# Altium PCB Plant.PcbDoc
Units mm, origin at the board's own origin, x right, y up, seen from the top; angles counter-clockwise.
Board outline 16 x 13 mm, 4 copper layers (L1, L2, L3, L4), stack 1.581 mm thick; 30 components, 24 nets, 99 pads, 22 vias.
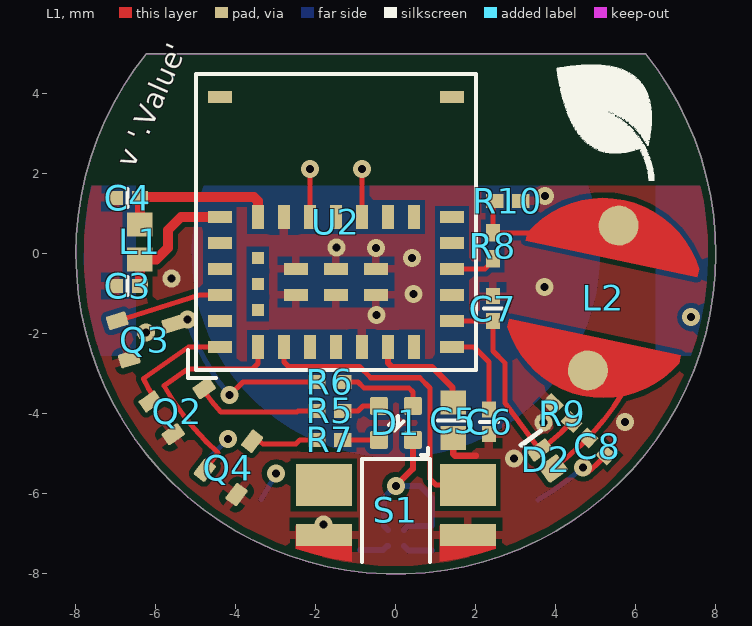
[diagram p0: L1 view]
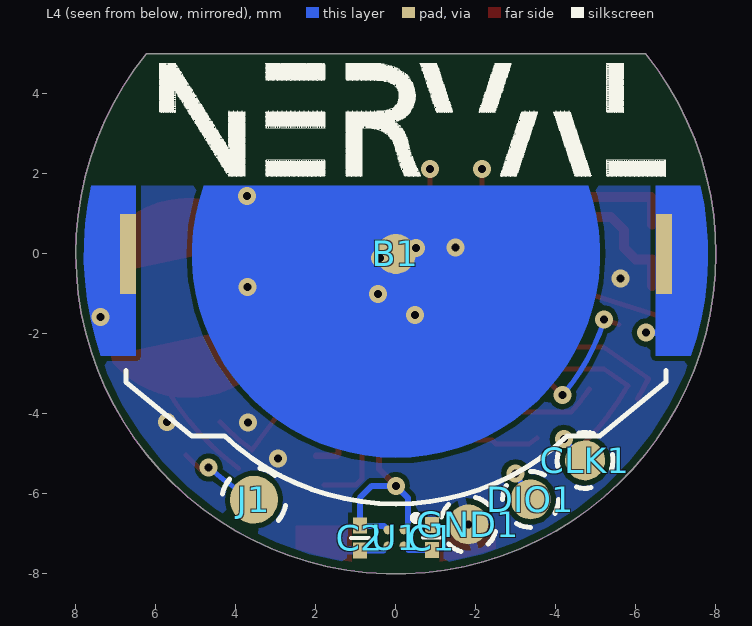
[diagram p1: L4 view, seen from below]
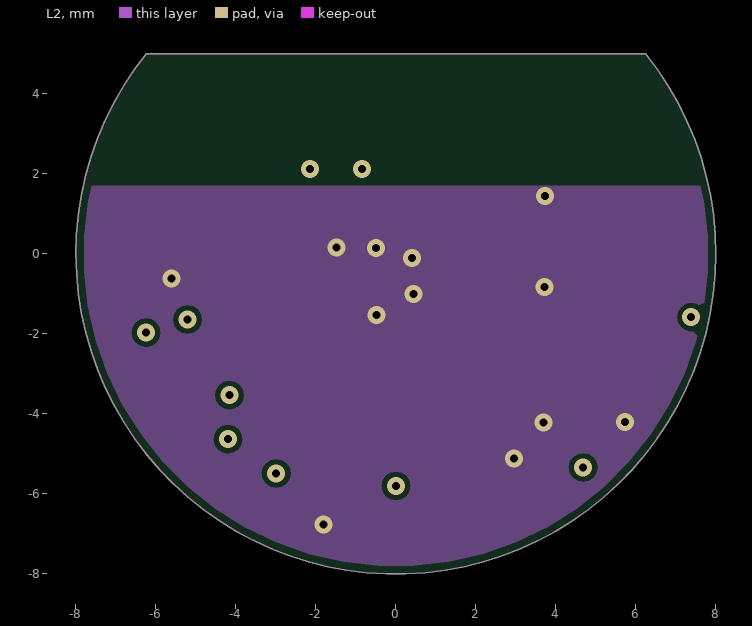
[diagram p2: L2]
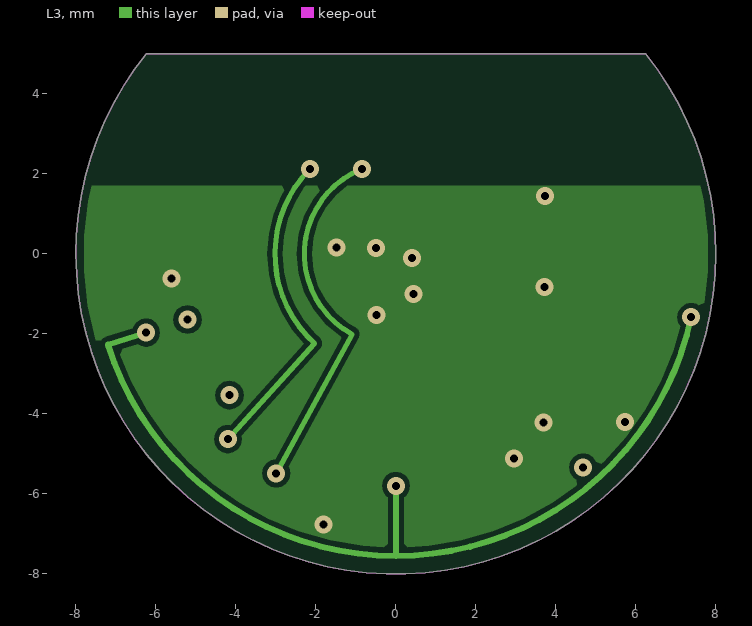
[diagram p3: L3]
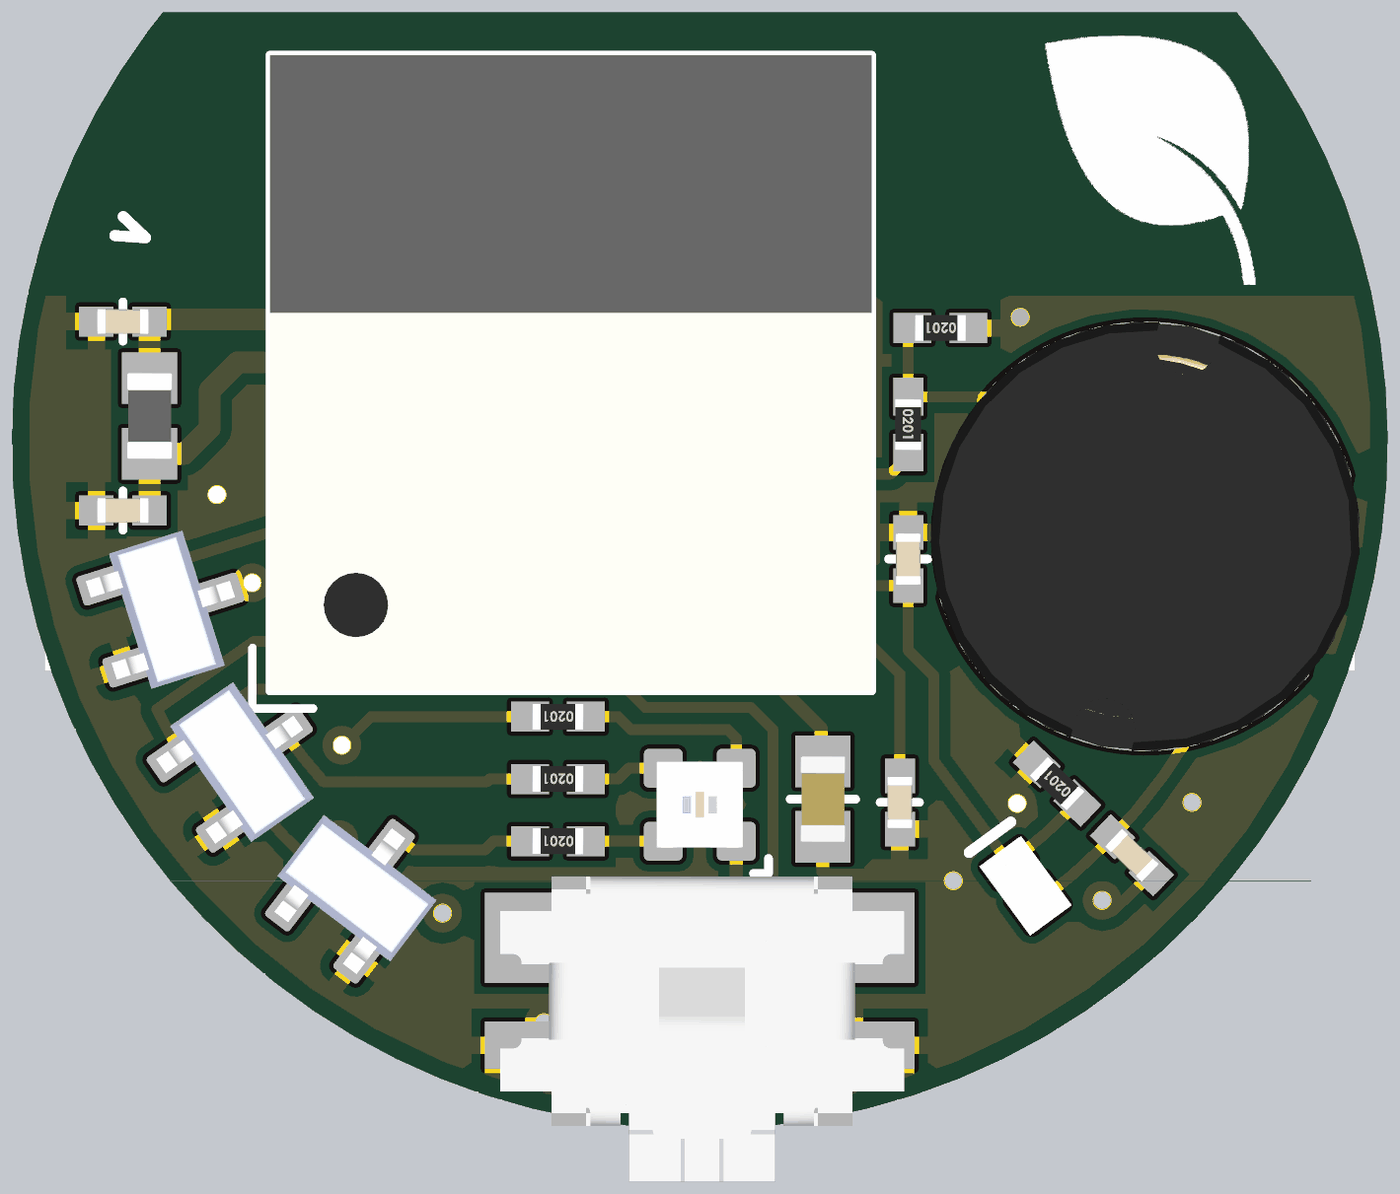
[diagram p4: 3D render of the assembled board from above, using the file's embedded part models]
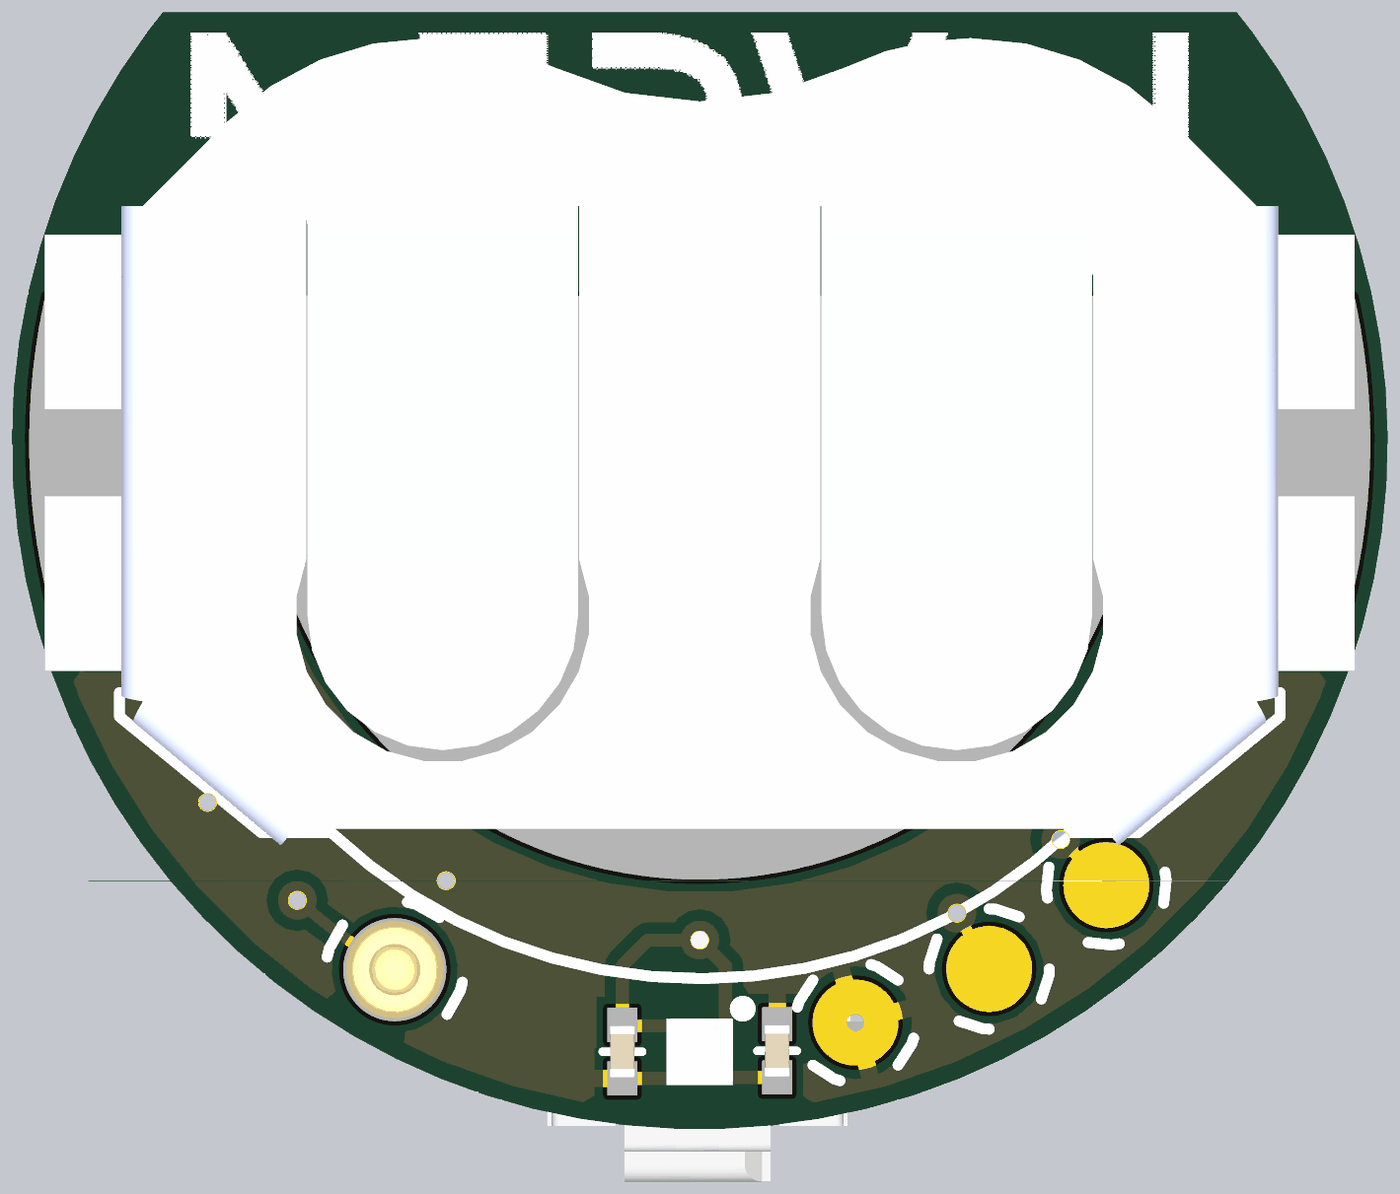
[diagram p5: 3D render of the assembled board from below, using the file's embedded part models]

## Layer stack, top to bottom
Top Solder: solder mask 0.025, SM-006, Dk 3.7
L1: signal copper 0.035
Dielectric 1: prepreg 0.1803, PP-021, Dk 4.7
L2: signal copper 0.035
Dielectric 2: core 1.08, Core-042, Dk 4.6
L3: signal copper 0.035
Dielectric 3: prepreg 0.1803, PP-021, Dk 4.7
L4: signal copper 0.035
Bottom Solder: solder mask 0.025, SM-006, Dk 3.7

## Board outline
-6.245,5 ccw(c0,0) 6.245,5

## Design rules (kind name [scope] priority, off if disabled: settings)
BoardOutlineClearance [All] p1: gap=0.2 ignorepadtopadclearanceinfootprint=FALSE
Clearance [All] p1: gap=0.127 ignorepadtopadclearanceinfootprint=FALSE
ComponentClearance [All] p1: gap=0.025 collisioncheckmode=3 verticalgap=0.025 showdistances=FALSE
DiffPairsRouting [All] p1: maxlimit=10 minlimit=0.152 mostfreqgap=0.203 toplayer_minwidth=0.152 toplayer_maxwidth=0.381 toplayer_prefwidth=0.203 midlayer1_minwidth=0.152 midlayer1_maxwidth=0.381 midlayer1_prefwidth=0.203 midlayer2_minwidth=0.152 midlayer2_maxwidth=0.381 midlayer2_prefwidth=0.203 bottomlayer_minwidth=0.152 bottomlayer_maxwidth=0.381 bottomlayer_prefwidth=0.203 maxuncoupledlength=12.7
HoleSize [All] p1: absolutevalues=TRUE maxlimit=6.3 minlimit=0.2 maxpercent=80.000 minpercent=20.000
HoleToHoleClearance [All] p1: gap=0.254 allowstackedmicrovias=FALSE
MinimumAnnularRing [All] p1: minimumring=0.124
MinimumSolderMaskSliver [All] p1: minsoldermaskwidth=0.02
PlaneClearance [All] p1: clearance=0.254
PlaneConnect [All] p1: planeconnectstyle=Direct reliefexpansion=0.406 reliefentries=4 reliefconductorwidth=0.152 reliefairgap=0.152
PolygonConnect [All] p1: thpad.connectstyle=Relief thpad.reliefconductorwidth=0.203 thpad.reliefentries=4 thpad.polygonreliefangle="90 Angle" thpad.airgapwidth=0.152 smdpad.connectstyle=Relief smdpad.reliefconductorwidth=0.203 smdpad.reliefentries=4 smdpad.polygonreliefangle="90 Angle" smdpad.airgapwidth=0.152 via.connectstyle=Direct via.reliefconductorwidth=0.203 via.reliefentries=4 via.polygonreliefangle="90 Angle" via.airgapwidth=0.152
RoutingCorners [All] p1: cornerstyle=45-Degree minsetback=1.25 maxsetback=1.25
RoutingVias [All] p1: holewidth=0.2 width=0.45 viastyle="Through Hole" minholewidth=0.2 minwidth=0.45 maxholewidth=2.54 maxwidth=2.896
SilkToSilkClearance [All] p1: silktosilkclearance=0
SilkToSolderMaskClearance [IsPad] p1: minsilkscreentomaskgap=0 clearancetoexposedcopper=FALSE
SolderMaskExpansion [All] p1: expansion=0.05
Width Power [InNetClass('Power')] p1: maxlimit=0.305 minlimit=0.152 preferedwidth=0.254
Width [All] p2: maxlimit=0.254 minlimit=0.127 preferedwidth=0.152 checkconnectedcopper=TRUE
20 further rules are at their usual default settings.

## Classes and differential pairs
component class Plant: v
component class UI: D1 Q2 Q3 Q4 R5 R6 R7 S1
component class Power: B1 C1 C2 U1
component class AFE: C7 C8 C17 D2 J1 L2 R8 R9 R10
net class Power: GND Vbat Vdd Vdd_1V8
component class Radio: C3 C4 C5 C6 CLK1 DIO1 GND1 L1 U2

## Components (designator, comment, footprint, x,y, rotation, side; value= is the part's Value field where it differs from the comment)
B1 "Single Cell" "LINX BAT-HLD-012-SMT" 0,0 r0 bottom locked value=Battery
C1 "0u22" "CAP 0201/0603" -0.9,-7.09 r270 bottom
C2 "0u22" "CAP 0201/0603" 0.9,-7.1 r90 bottom
C3 "1p" "CAP 0201/0603" -6.71,-0.8 r180 top
C4 "1p" "CAP 0201/0603" -6.71,1.4 r180 top
C5 "2u2" "CAP 0402/1005" 1.432,-4.16 r90 top
C6 "0u22" "CAP 0201/0603" 2.327,-4.198 r90 top
C7 "100pF" "CAP 0201_0603" 2.425,-1.365 r270 top
C8 "10000pF" "CAP 0201_0603" 5.028,-4.813 r316.25 top
CLK1 "Test Point" "TP SMD 1MM" -4.729,-5.161 r227.5 bottom value=TP
D1 "RBG LED" "LED 0101/0404 RGB" 0,-4.225 r270 top value=RGB
D2 "SDM05U40CSP-7" "DIODES X3-WLB1006-2" 3.79,-5.169 r306.25 top
DIO1 "Test Point" "TP SMD 1MM" -3.367,-6.137 r240 bottom value=TP
GND1 "Test Point" "TP SMD 1MM" -1.812,-6.761 r255 bottom value=TP
J1 "1 Pin" "HARWIN P70-5100045R" 3.548,-6.145 r160.54 bottom value="Pogo Pin"
L1 "1n1" "FER 0402/1005" -6.4,0.3 r270 top
L2 "10m" "IND BOURNS SDR0503" 5.184,-1.102 r78 top
Q2 "BRT NPN" "ON SEMI SOT-416" -5.324,-3.728 r35 top
Q3 "BRT NPN" "ON SEMI SOT-416" -6.199,-1.955 r17.5 top
Q4 "BRT NPN" "ON SEMI SOT-416" -3.987,-5.196 r52.5 top
R5 "475 Ohms" "RES 0201_0603" -1.65,-3.925 r180 top
R6 "475 Ohms" "RES 0201_0603" -1.65,-3.2 r180 top
R7 "475 Ohms" "RES 0201_0603" -1.65,-4.65 r180 top
R8 "10 kOhms" "RES 0201_0603" 2.425,0.2 r270 top
R9 "1 MOhms" "RES 0201_0603" 4.158,-3.98 r136.49 top
R10 "3.3 kOhms" "RES 0201_0603" 2.8,1.325 r180 top
S1 "SPST-NO" "Panasonic evqp7" 0,-6.5 r0 top
U1 "STLQ020J33R" "ST flip-chip4" 0,-7.1 r0 bottom
U2 "MBN52832" "Murata MBN52832" -1.5,0.8 r0 top
v "Version" VERSION -6.27,2.759 r66.25 top value=0.2

## Footprints (in the part's own frame and the unit in brackets; to place one, negate y for a bottom-side part, rotate by r counter-clockwise, add the part's x,y. Pads: shape width x height; smd on the part's side, far side on the other; paste and mask are expansions set on the pad)
"CAP 0201/0603" [mm] "Chip Capacitor, 2-Leads, Body 0.60x0.30mm, IPC Medium Density"
  rect 0.4x0.35 smd: 1(-0.31,0) 2(0.31,0)
  silkscreen extent 0,-0.23 0,0.23, body extent -0.3,-0.15 0.3,0.15, height 0.3
"CAP 0201_0603" [mm] "Chip Capacitor, 2-Leads, Body 0.60x0.30mm, IPC Medium Density"
  rect 0.4x0.35 smd: 1(-0.31,0) 2(0.31,0)
  body extent -0.3,-0.15 0.3,0.15, height 0.3
"CAP 0402/1005" [mm] "Chip Capacitor, 2-Leads, Body 1.02x0.51mm, IPC Medium Density"
  rect 0.6x0.64 smd: 1(-0.44,0) 2(0.44,0)
  silkscreen extent 0,-0.38 0,0.38, body extent -0.5,-0.26 0.5,0.26, height 0.52
"DIODES X3-WLB1006-2" [mm]
  rrect25% 0.332x0.579 smd: 1(-0.329,0)
  rrect25% 0.507x0.579 smd: 2(0.241,0)
  silkscreen extent -0.7,-0.3 -0.7,0.3, body extent -0.5,-0.3 0.5,0.3, height 0.26
"FER 0402/1005" [mm] "Chip Ferrite, 2-Leads, Body 1.02x0.51mm, IPC Medium Density"
  rect 0.6x0.64 smd: 1(-0.44,0) 2(0.44,0)
  body extent -0.5,-0.26 0.5,0.26, height 0.52
"HARWIN P70-5100045R" [mm]
  round 1.2 smd: 1(0,0)
  silkscreen extent -0.69,-0.69 0.69,0.69, body extent -0.57,-0.57 0.57,0.57, height 4.8
"IND BOURNS SDR0503" [mm]
  round 1 smd: 1(-1.85,0) 2(1.85,0)
  L1 region: -1.197,-2.195 -1,-2.195 -1,2.195 -1.197,2.195 -2.001,1.499 -2.443,0.532 -2.443,-0.532 -2.001,-1.499 -1.197,-2.195
  L1 region: 1.197,2.195 1,2.195 1,-2.195 1.197,-2.195 2.001,-1.499 2.443,-0.532 2.443,0.532 2.001,1.499 1.197,2.195
  body extent -2.5,-2.5 2.5,2.5, height 3
"LED 0101/0404 RGB" [mm]
  rrect25% 0.45x0.45 smd: 1(0.425,0.425) 2(0.425,-0.425) 3(-0.425,-0.425) 4(-0.425,0.425)
  silkscreen extent -0.18,-0.18 0.8,0.8, body extent -0.5,-0.5 0.5,0.5, height 0.25
"LINX BAT-HLD-012-SMT" [mm]
  rect 0.4x2 smd: 1(-6.7,0) 1(6.7,0)
  round 1 smd paste-6: 2(0,0)
  L1 region: 6.5,-1.704 7.612,-1.704 7.789,0.436 7.375,2.543 7.375,2.543 6.5,2.549
  L1 region: -4.81,-1.701 -5.053,0.699 -4.165,2.943 -2.345,4.527 0,5.098 2.344,4.526 4.164,2.941 5.05,0.697 4.806,-1.704 4.806,-1.704 4.802,-1.702
  L1 region: -6.5,2.548 -7.373,2.548 -7.788,0.44 -7.613,-1.7 -7.613,-1.7 -6.5,-1.707
  silkscreen extent -6.75,2.92 6.75,4.55, body extent -7.62,-4.7 7.62,4.7, height 3.56
"Murata MBN52832" [mm]
  rect 0.3x0.6 smd: 1(-1.95,-3.125) 2(-1.3,-3.125) 3(-0.65,-3.125) 4(0,-3.125) 5(0.65,-3.125) 6(1.3,-3.125) 7(1.95,-3.125) 14(1.95,0.125) 15(1.3,0.125) 16(0.65,0.125) 17(0,0.125) 18(-0.65,0.125) 19(-1.3,0.125) 20(-1.95,0.125)
  rect 0.6x0.3 smd: 8(2.9,-3.125) 9(2.9,-2.475) 10(2.9,-1.825) 11(2.9,-1.175) 12(2.9,-0.525) 13(2.9,0.125) 21(-2.9,0.125) 22(-2.9,-0.525) 23(-2.9,-1.175) 24(-2.9,-1.825) 25(-2.9,-2.475) 26(-2.9,-3.125) 30(-1,-1.175) 31(0,-1.175) 32(1,-1.175) 33(-1,-1.825) 34(0,-1.825) 35(1,-1.825) 36(-2.9,3.125) 37(2.9,3.125)
  rect 0.3x0.3 smd: 27(-1.95,-0.9) 28(-1.95,-1.55) 29(-1.95,-2.2)
  silkscreen extent -3.7,-3.91 3.5,3.7, body extent -3.5,-3.7 3.5,3.7, height 1
"ON SEMI SOT-416" [mm] "SOT416, 3-Leads, Body 1.60x0.80mm, Pitch 1mm, IPC Medium Density"
  rrect25% 0.508x0.356 smd: 1(-0.647,0.5) 3(0.648,0)
  rrect25% 0.506x0.356 smd: 2(-0.648,-0.5)
  body extent -0.8,-0.82 0.8,0.82, height 0.75
"Panasonic evqp7" [mm]
  rect 1.4x1.05 smd: 1(-1.8,0.725) 1'(1.8,0.725)
  rect 1.4x0.55 smd: 2(-1.8,-0.525) 2'(1.8,-0.525)
  silkscreen extent -0.85,-1.2 0.85,1.38, body extent -2.32,-2.11 2.38,1.44, height 1.35
"RES 0201_0603" [mm] "Chip Resistor, 2-Leads, Body 0.60x0.30mm, IPC Medium Density"
  rect 0.44x0.35 smd: 1(-0.325,0) 2(0.325,0)
  body extent -0.3,-0.15 0.3,0.15, height 0.21
"ST flip-chip4" [mm]
  round 0.22 smd mask+0.06: A1(-0.2,-0.2) A2(-0.2,0.2) B1(0.2,-0.2) B2(0.2,0.2)
  silkscreen extent -0.55,-0.55 -0.45,-0.45, body extent -0.39,-0.39 0.39,0.39, height 0.5
"TP SMD 1MM" [mm]
  round 1 smd paste-1: 1(0,0)
  silkscreen extent -0.61,-0.61 0.61,0.61
VERSION [mm]

## Part data
B1: library part BAT-HLD-012-SMT, "CR1216, CR1225 Battery", Manufacturer=Linx, Package Quantity=1000, Supplier Part Number 1=BAT-HLD-012-SMT-ND, ComponentLink1Description=https://datasheet.ciiva.com/4642/bat-hld-012-smt20, ComponentLink1URL=https://datasheet.ciiva.com/4642/bat-hld-012-smt20, ComponentLink2Description=https://datasheet.ciiva.com/4/bat-hld-012-smt-4040, ComponentLink2URL=https://datasheet.ciiva.com/4/bat-hld-012-smt-4040, ComponentLink3Description=https://datasheet.ciiva.com/16418/bat-hld-012-smt-, ComponentLink3URL=https://datasheet.ciiva.com/16418/bat-hld-012-smt-, Creation Date=22/06/2021, Lead Free="Lead Free", Manufacturer 1=Linx, Manufacturer Part Number=BAT-HLD-012-SMT, Manufacturer Part Number 1=BAT-HLD-012-SMT, Mount="Surface Mount,PCB", Number of Batteries=1, Number of Cells=1, Part Number=BAT-HLD-012-SMT, Revision Date=22/06/2021, RoHS=Yes, Stock 1=3192, Supplier 1=Digi-Key, Termination=SMD/SMT
C1 C2 C6: library part GRM033R61A224KE90D, "CAP CER 0201 0.22uF 10V 10% X5R", Capacitance=220nF, Case/Package=0201, Case Code (Metric)=0603, Dielectric=X5R, Manufacturer=Murata, Max Operating Temperature=85°C, Min Operating Temperature=-55°C, Resistor Type=Ceramic, Supplier Part Number 1=490-10411-1-ND, Tolerance=10%, Voltage Rating=10V, Case Code (Imperial)=0201, ComponentLink1Description=http://www.farnell.com/datasheets/2867835.pdf?src-supplier=Farnell, ComponentLink1URL=http://www.farnell.com/datasheets/2867835.pdf?src-supplier=Farnell, ComponentLink2Description=http://www.mouser.com/ds/2/281/c02e-2905.pdf?src-s, ComponentLink2URL=http://www.mouser.com/ds/2/281/c02e-2905.pdf?src-s, ComponentLink3Description=http://search.murata.co.jp/Ceramy/image/img/A01X/G, ComponentLink3URL=http://search.murata.co.jp/Ceramy/image/img/A01X/G, ComponentLink4Description=http://www.farnell.com/datasheets/2867835.pdf?src-, ComponentLink4URL=http://www.farnell.com/datasheets/2867835.pdf?src-, ComponentLink5Description=http://www.mouser.com/ds/2/281/c02e-2905.pdf?src-s, ComponentLink5URL=http://www.mouser.com/ds/2/281/c02e-2905.pdf?src-s, ComponentLink6Description=http://search.murata.co.jp/Ceramy/image/img/A01X/G, ComponentLink6URL=http://search.murata.co.jp/Ceramy/image/img/A01X/G, ComponentLink7Description=http://search.murata.co.jp/Ceramy/image/img/A01X/p, ComponentLink7URL=http://search.murata.co.jp/Ceramy/image/img/A01X/p, Creation Date=19/01/2021, Height=0.5mm, Lead Free="Lead Free", Length=0.024inch, Manufacturer 1=Murata, Manufacturer Part Number=GRM033R61A224KE90D, Manufacturer Part Number 1=GRM033R61A224KE90D, Mount="Surface Mount", Note=recommended, Packaging="Tape and Reel", Part Number=GRM033R61A224KE90D, Pricing 1="1=0,10000, 10=0,03600, 50=0,01980, 100=0,01620, 500=0,01156, 1000=0,00908, 2500=0,00825, 5000=0,00759 (USD)", Revision Date=19/01/2021, RoHS=Yes, RoHS Compliant=Yes, Stock 1=951885, Supplier 1=Digi-Key, Thickness=0.013inch, Voltage Rating (DC)=10V, Width=0.012inch
C3 C4: library part GRM0335C1H1R0BA01D, "CAP CER 0201 1pF 50V ±0.1pF C0G", Capacitance=1pF, Case/Package=0201, Case Code (Metric)=0603, Dielectric=C0G, Manufacturer=Murata, Max Operating Temperature=125°C, Min Operating Temperature=-55°C, Package Quantity=15000, Supplier Part Number 1=490-9660-1-ND, Voltage Rating=50V, Case Code (Imperial)=0201, ComponentLink1Description=https://datasheet.ciiva.com/29538/partnumbering-e-01-29538566.pdf?src-supplier=Digi-Key, ComponentLink1URL=https://datasheet.ciiva.com/29538/partnumbering-e-01-29538566.pdf?src-supplier=Digi-Key, Creation Date=02/07/2019, Depth=0.3mm, Length=0.024inch, Manufacturer Part Number=GRM0335C1H1R0BA01D, Mount="Surface Mount", Packaging="Tape and Reel", Part Number=GRM0335C1H1R0BA01D, Pricing 1="1=0,10000, 10=0,02000, 100=0,00900, 500=0,00644, 1000=0,00506, 2500=0,00460, 5000=0,00423 (USD)", Revision Date=02/07/2019, RoHS=Yes, Stock 1=521200, Supplier 1=Digi-Key, Termination=SMD/SMT, Thickness=0.013inch, Voltage Rating (DC)=50V, Width=0.012inch
C5: library part GRM155R61C225KE11D, "CAP CER 0402 2.2uF 16V 10% X5R", Capacitance=2.2uF, Case/Package=0402, Case Code (Metric)=1005, Manufacturer=Murata, Max Operating Temperature=85°C, Min Operating Temperature=-55°C, Supplier Part Number 1=490-10695-1-ND, Tolerance=10%, Voltage Rating=16V, Case Code (Imperial)=0402, ComponentLink1Description=http://components.arrow.com/part/dataview/0323_07281440?src-supplier=Arrow+Europe, ComponentLink1URL=http://components.arrow.com/part/dataview/0323_07281440?src-supplier=Arrow+Europe, ComponentLink2Description=http://www.mouser.com/ds/2/281/c02e-2905.pdf?src-s, ComponentLink2URL=http://www.mouser.com/ds/2/281/c02e-2905.pdf?src-s, ComponentLink3Description=https://search.murata.co.jp/Ceramy/image/img/A01X/, ComponentLink3URL=https://search.murata.co.jp/Ceramy/image/img/A01X/, Creation Date=10/10/2019, Height=0.3mm, Length=0.039inch, Manufacturer Part Number=GRM155R61C225KE11D, Material=Ceramic, Mount="Surface Mount", Note=recommended, Packaging="Tape and Reel", Part Number=GRM155R61C225KE11D, Pricing 1="1=0,23000, 10=0,15900, 100=0,08990, 500=0,06348, 1000=0,05555, 2500=0,05290, 5000=0,04893 (USD)", Revision Date=10/10/2019, RoHS=Yes, Stock 1=2251620, Supplier 1=Digi-Key, Thickness=0.022inch, Voltage Rating (DC)=16V, Width=0.02inch
C7: library part GRM0335C1H101GA01D, "CAP CER 100PF 50V C0G/NP0 0201", Device Package="0201 (0603 Metric)", Manufacturer="Murata Electronics", Operating Temperature="-55°C ~ 125°C", Supplier Part Number 1=490-7751-1-ND, Temperature Coefficient="C0G, NP0", Tolerance=±2%, Voltage - Rated=50V, Applications="General Purpose", Capacitance=100pF, ComponentLink1Description=Datasheet, ComponentLink1URL=https://search.murata.co.jp/Ceramy/image/img/A01X/G101/ENG/GRM0335C1H101GA01-01.pdf, ComponentLink2Description="DigiKey Link", ComponentLink2URL=http://digikey.com/product-detail/en/murata-electronics/GRM0335C1H101GA01D/490-7751-1-ND/4357967, LastUpdated="02/09/2020 0:58:53", Lifecycle Status=Active, Minimum Order=1, Mounting Type="Surface Mount, MLCC", Package / Case="0201 (0603 Metric)", Packaging=CutTape, PartId=1001, Part Number=GRM0335C1H101GA01D, Part Status=Active, Price=0.10, Series=GRM, Size / Dimension="0.024\" L x 0.012\" W (0.60mm x 0.30mm)", Supplier 1=DigiKey, Thickness (Max)="0.013\" (0.33mm)"
C8: library part GRM033R61A103KA01D, "CAP CER 10000PF 10V X5R 0201", Device Package="0201 (0603 Metric)", Manufacturer="Murata Electronics", Operating Temperature="-55°C ~ 85°C", Supplier Part Number 1=490-3166-1-ND, Temperature Coefficient=X5R, Tolerance=±10%, Voltage - Rated=10V, Applications="General Purpose", Capacitance=10000pF, ComponentLink1Description=Datasheet, ComponentLink1URL=https://www.murata.com/~/media/webrenewal/support/library/catalog/products/capacitor/mlcc/c02e.ashx?la=en-us, ComponentLink2Description="DigiKey Link", ComponentLink2URL=http://digikey.com/product-detail/en/murata-electronics/GRM033R61A103KA01D/490-3166-1-ND/702707, LastUpdated="02/09/2020 0:59:28", Lifecycle Status=Active, Minimum Order=1, Mounting Type="Surface Mount, MLCC", Package / Case="0201 (0603 Metric)", Packaging=CutTape, PartId=601, Part Number=GRM033R61A103KA01D, Part Status=Active, Price=0.10, Series=GRM, Size / Dimension="0.024\" L x 0.012\" W (0.60mm x 0.30mm)", Supplier 1=DigiKey, Thickness (Max)="0.013\" (0.33mm)"
CLK1 DIO1 GND1: library part TPSMD1, "TP 1mm round pad", Creation Date=08/05/2019, Part Number=TPSMD1, Revision Date=03/07/2019
D1: library part SML-LX0404SIUPGUSB, "LED 0404 RBG", Case/Package=0404, Case Code (Metric)=1010, Color=Blue, Forward Current=2mA, Forward Voltage=2.73V, Lens Color=Colorless, Manufacturer=Lumex, Max Operating Temperature=85°C, Min Operating Temperature=-40°C, Package Quantity=2000, Power Rating=30mW, Supplier Part Number 1=67-2125-1-ND, Case Code (Imperial)=0404, ComponentLink1Description=https://datasheet.ciiva.com/1333/lumex-quasarbrite, ComponentLink1URL=https://datasheet.ciiva.com/1333/lumex-quasarbrite, ComponentLink2Description=https://datasheet.ciiva.com/4689/sml-lx0404siupgus, ComponentLink2URL=https://datasheet.ciiva.com/4689/sml-lx0404siupgus, ComponentLink3Description=https://datasheet.ciiva.com/1246/1423960-1246392.p, ComponentLink3URL=https://datasheet.ciiva.com/1246/1423960-1246392.p, ComponentLink4Description=https://datasheet.ciiva.com/2118/sml-lx0404siupgus, ComponentLink4URL=https://datasheet.ciiva.com/2118/sml-lx0404siupgus, ComponentLink5Description=https://datasheet.ciiva.com/16199/sml-lx0404siupgu, ComponentLink5URL=https://datasheet.ciiva.com/16199/sml-lx0404siupgu, ComponentLink6Description=https://datasheet.ciiva.com/14604/70127422-1460494, ComponentLink6URL=https://datasheet.ciiva.com/14604/70127422-1460494, ComponentLink7Description=https://datasheet.ciiva.com/1246/1484526-1246779.p, ComponentLink7URL=https://datasheet.ciiva.com/1246/1484526-1246779.p, ComponentLink8Description=https://datasheet.ciiva.com/2118/sml-lx0404siupgus, ComponentLink8URL=https://datasheet.ciiva.com/2118/sml-lx0404siupgus, ComponentLink9Description=https://datasheet.ciiva.com/2118/sml-lx0404siupgus, ComponentLink9URL=https://datasheet.ciiva.com/2118/sml-lx0404siupgus, Creation Date=06/05/2019, Height=0.3mm, Lead Free="Lead Free", Length=1mm, Lens Style=Square, Lens Transparency=Clear, Luminous Intensity=20mcd, Manufacturer Part Number=SML-LX0404SIUPGUSB, Mount="Surface Mount", Number of LEDs=3, Packaging="Tape and Reel", Part Number=SML-LX0404SIUPGUSB, Pricing 1="1 = 1,29000, 10 = 1,04700, 25 = 0,80560, 100 = 0,7", REACH SVHC="No SVHC", Revision Date=08/05/2019, RoHS=Yes, Stock 1=106243, Supplier 1=Digi-Key, Test Current=2mA, Viewing Angle=120°, Wavelength=465nm, Width=1mm
D2: "DIODE SCHTKY 40V 0.5A X3WLB1006", Capacitance=3.5E-11F, Manufacturer=Diodes, Max Operating Temperature=150°C, Min Operating Temperature=-55°C, Supplier Part Number 1=SDM05U40CSP-7DICT-ND, Creation Date=19/07/2021, Manufacturer 1=Diodes, Manufacturer Part Number=SDM05U40CSP-7, Manufacturer Part Number 1=SDM05U40CSP-7, Mount="Surface Mount", Number of Pins=2, Packaging="Tape and Reel", Part Number=SDM05U40CSP-7, Revision Date=19/07/2021, RoHS=Yes, Stock 1=220954, Supplier 1=Digi-Key
J1: library part P70-5100045R, "POGO PIN 4MM SMD", Current Rating=2A, Manufacturer=Harwin, Manufacturer Part Number=P70-5100045, Supplier Part Number 1=952-3125-ND, ComponentLink1Description=https://cdn.harwin.com/pdfs/P70-510.pdf?src-supplier=Digi-Key, ComponentLink1URL=https://cdn.harwin.com/pdfs/P70-510.pdf?src-supplier=Digi-Key, ComponentLink2Description=http://www.farnell.com/datasheets/2151574.pdf?src-supplier=Element14, ComponentLink2URL=http://www.farnell.com/datasheets/2151574.pdf?src-supplier=Element14, Creation Date=22/06/2021, Length=4.8mm, Manufacturer 1=Harwin, Manufacturer Part Number 1=P70-5100045, Material=Brass, Mount="Surface Mount", Part Number=P70-5100045R, Plating=Gold, REACH SVHC="No SVHC", Revision Date=22/06/2021, RoHS=Yes, RoHS Compliant=Yes, Stock 1=2171, Supplier 1=Digi-Key
L1: library part LQP03TN1N1B02D_mod, "IND 0201 1.1nH +-0.1nH 0.75A 0.1R", Case/Package=0201, Case Code (Metric)=0603, Current Rating=750mA, DC Resistance (DCR)=100mR, Inductance=1.1nH, Manufacturer=Murata, Manufacturer Part Number=LQP03TN1N1B02D, Max Operating Temperature=125°C, Min Operating Temperature=-55°C, Package Quantity=15000, Self Resonant Frequency=17GHz, Supplier Part Number 1=490-6715-1-ND, Test Frequency=500MHz, Case Code (Imperial)=0201, Composition="Thin Film", Core Material=Non-Magnetic, Creation Date=10/10/2019, Max DC Current=750mA, Mount="Surface Mount", Packaging="Tape and Reel", Part Number=LQP03TN1N1B02D_mod, Pricing 1="1=0,10000, 10=0,04700, 100=0,03110, 500=0,02588, 1000=0,02174, 2500=0,01863 (USD)", Q Factor=14, Revision Date=10/10/2019, RoHS=Yes, Shielding=Unshielded, Stock 1=87622, Supplier 1=Digi-Key, Termination=SMD/SMT
L2: library part SDR0503-103JL, "IND (0503) 10mH +-5% 0.04A 110R", Case/Package=0503, Current=59mA, Current Rating=27mA, DC Resistance (DCR)=110R, Inductance=10mH, Inductance Tolerance=5%, Manufacturer=Bourns, Max Operating Temperature=125°C, Min Operating Temperature=-40°C, Package Quantity=500, Resistor Type=Wirewound, Saturation Current=40mA, Self Resonant Frequency=1MHz, Supplier Part Number 1=SDR0503-103JLCT-ND, Test Frequency=1kHz, Body Material=Ferrite, ComponentLink1Description=https://datasheet.ciiva.com/8515/sdr0503-8515929.pdf?src-supplier=Avnet, ComponentLink1URL=https://datasheet.ciiva.com/8515/sdr0503-8515929.pdf?src-supplier=Avnet, ComponentLink2Description=https://datasheet.ciiva.com/6691/sdr0503-6691389.p, ComponentLink2URL=https://datasheet.ciiva.com/6691/sdr0503-6691389.p, ComponentLink3Description=https://datasheet.ciiva.com/6691/sdr0503-6691390.p, ComponentLink3URL=https://datasheet.ciiva.com/6691/sdr0503-6691390.p, ComponentLink4Description=https://datasheet.ciiva.com/6691/sdr0503-6691391.p, ComponentLink4URL=https://datasheet.ciiva.com/6691/sdr0503-6691391.p, ComponentLink5Description=https://datasheet.ciiva.com/8517/sdr0503-8517757.p, ComponentLink5URL=https://datasheet.ciiva.com/8517/sdr0503-8517757.p, ComponentLink6Description=https://datasheet.ciiva.com/28535/1577670-28535983, ComponentLink6URL=https://datasheet.ciiva.com/28535/1577670-28535983, ComponentLink7Description=https://datasheet.ciiva.com/48691/001056092-da-01-, ComponentLink7URL=https://datasheet.ciiva.com/48691/001056092-da-01-, Core Material=Ferrite, Creation Date=22/06/2021, DC Current=27mA, Depth=5.1mm, Diameter=5mm, Height=3.3mm, Height - Seated (Max)=0.13inch, Length=5mm, Manufacturer 1=Bourns, Manufacturer Part Number=SDR0503-103JL, Manufacturer Part Number 1=SDR0503-103JL, Max DC Current=27mA, Military Standard=Not, Mount="Surface Mount", Number of Pins=2, Packaging="Tape and Reel", Part Number=SDR0503-103JL, Q Factor=30, Radiation Hardening=No, REACH SVHC="No SVHC", Resistance=110R, Revision Date=22/06/2021, RMS Current (Irms)=27mA, RoHS=Yes, RoHS Compliant=Yes, Sample Rate (Hz)=1kHz, Series=SDR0503, Shielding=Unshielded, Stock 1=3024, Supplier 1=Digi-Key, Termination=SMD/SMT, Tolerance=5%, Width=3mm
Q2 Q3 Q4: library part DTC114EET1G, "TRANS PREBIAS NPN 200MW SC75", Case/Package=SOT-416, Collector Emitter Breakdown Voltage=50V, Collector Emitter Saturation Voltage=250mV, Continuous Collector Current=100mA, Current Rating=70mA, Manufacturer="ON Semiconductor", Max Operating Temperature=150°C, Max Power Dissipation=200mW, Min Operating Temperature=-55°C, Output Voltage=300mV, Package Quantity=1, Supplier Part Number 1=DTC114EET1GOSCT-ND, Collector Emitter Voltage (VCEO)=50V, ComponentLink1Description=https://datasheet.ciiva.com/15139/getdatasheetpart, ComponentLink1URL=https://datasheet.ciiva.com/15139/getdatasheetpart, Contact Plating=Tin, Creation Date=06/05/2019, Element Configuration=Single, Halogen Free="Halogen Free", Height=0.75mm, hFE Min=35, Lead Free="Lead Free", Length=1.6mm, Manufacturer Part Number=DTC114EET1G, Max Breakdown Voltage=50V, Max Collector Current=100mA, Max Output Current=100mA, Number of Pins=3, Operating Supply Voltage=50V, Packaging="Tape and Reel", Part Number=DTC114EET1G, Polarity=NPN, Pricing 1="1 = 0,16000, 10 = 0,14200, 100 = 0,07730, 500 = 0,", Radiation Hardening=No, REACH SVHC="No SVHC", Revision Date=08/05/2019, RoHS=Yes, Stock 1=38538, Supplier 1=Digi-Key, Voltage Rating (DC)=50V, Width=0.8mm
R5 R6 R7: library part CRCW0201475RFKED, "RES SMD 475 OHM 1% 1/20W 0201", Device Package="0201 (0603 Metric)", Manufacturer="Vishay Dale", Operating Temperature="-55°C ~ 155°C", Power (Watts)="0.05W, 1/20W", Supplier Device Package=0201, Supplier Part Number 1=541-475AABCT-ND, Temperature Coefficient=±100ppm/°C, Tolerance=±1%, ComponentLink1Description=Datasheet, ComponentLink1URL=http://www.vishay.com/docs/20052/crcw0201e3.pdf, ComponentLink2Description="DigiKey Link", ComponentLink2URL=http://digikey.com/product-detail/en/vishay-dale/CRCW0201475RFKED/541-475AABCT-ND/1968203, Composition="Thick Film", Height - Seated (Max)="0.011\" (0.28mm)", LastUpdated="02/09/2020 1:06:25", Lifecycle Status=Active, Minimum Order=1, Number of Terminations=2, Package / Case="0201 (0603 Metric)", Packaging=TapeAndReel, PartId=82, Part Number=CRCW0201475RFKED, Part Status=Active, Price=0.03, Resistance="475 Ohms", Series=CRCW, Size / Dimension="0.024\" L x 0.012\" W (0.60mm x 0.30mm)", Supplier 1=DigiKey
R8: library part CRCW020110K0FNED, "RES SMD 10K OHM 1% 1/20W 0201", Device Package="0201 (0603 Metric)", Manufacturer="Vishay Dale", Operating Temperature="-55°C ~ 155°C", Power (Watts)="0.05W, 1/20W", Supplier Device Package=0201, Supplier Part Number 1=541-10.0KABCT-ND, Temperature Coefficient=±200ppm/°C, Tolerance=±1%, ComponentLink1Description=Datasheet, ComponentLink1URL=http://www.vishay.com/docs/20052/crcw0201e3.pdf, ComponentLink2Description="DigiKey Link", ComponentLink2URL=http://digikey.com/product-detail/en/vishay-dale/CRCW020110K0FNED/541-10.0KABCT-ND/1183609, Composition="Thick Film", Height - Seated (Max)="0.011\" (0.28mm)", LastUpdated="02/09/2020 1:06:16", Lifecycle Status=Active, Minimum Order=1, Number of Terminations=2, Package / Case="0201 (0603 Metric)", Packaging=TapeAndReel, PartId=2299, Part Number=CRCW020110K0FNED, Part Status=Active, Price=0.01, Resistance="10 kOhms", Series=CRCW, Size / Dimension="0.024\" L x 0.012\" W (0.60mm x 0.30mm)", Supplier 1=DigiKey
R9: library part RMCF0201FT1M00, "RES 1M OHM 1% 1/20W 0201", Device Package="0201 (0603 Metric)", Manufacturer="Stackpole Electronics Inc", Operating Temperature="-55°C ~ 125°C", Power (Watts)="0.05W, 1/20W", Supplier Device Package=0201, Supplier Part Number 1=RMCF0201FT1M00CT-ND, Temperature Coefficient=±200ppm/°C, Tolerance=±1%, ComponentLink1Description=Datasheet, ComponentLink1URL=https://www.seielect.com/catalog/sei-rmcf_rmcp.pdf, ComponentLink2Description="DigiKey Link", ComponentLink2URL=http://digikey.com/product-detail/en/stackpole-electronics-inc/RMCF0201FT1M00/RMCF0201FT1M00CT-ND/3905980, Composition="Thick Film", Height - Seated (Max)="0.010\" (0.26mm)", LastUpdated="02/09/2020 1:06:14", Lifecycle Status=Active, Minimum Order=1, Number of Terminations=2, Package / Case="0201 (0603 Metric)", Packaging=CutTape, PartId=3123, Part Number=RMCF0201FT1M00, Part Status=Active, Price=0.10, Resistance="1 MOhms", Series=RMCF, Size / Dimension="0.024\" L x 0.012\" W (0.60mm x 0.30mm)", Supplier 1=DigiKey
R10: library part CRCW02013K30FNED, "RES SMD 3.3K OHM 1% 1/20W 0201", Device Package="0201 (0603 Metric)", Manufacturer="Vishay Dale", Operating Temperature="-55°C ~ 155°C", Power (Watts)="0.05W, 1/20W", Supplier Device Package=0201, Supplier Part Number 1=541-CRCW02013K30FNEDCT-ND, Temperature Coefficient=±200ppm/°C, Tolerance=±1%, ComponentLink1Description=Datasheet, ComponentLink1URL=http://www.vishay.com/docs/20052/crcw0201e3.pdf, ComponentLink2Description="DigiKey Link", ComponentLink2URL=http://digikey.com/product-detail/en/vishay-dale/CRCW02013K30FNED/541-CRCW02013K30FNEDCT-ND/10448664, Composition="Thick Film", Height - Seated (Max)="0.011\" (0.28mm)", LastUpdated="02/09/2020 1:06:17", Lifecycle Status=Active, Minimum Order=1, Number of Terminations=2, Package / Case="0201 (0603 Metric)", Packaging=TapeAndReel, PartId=2040, Part Number=CRCW02013K30FNED, Part Status=Active, Price=0.01, Resistance="3.3 kOhms", Series=CRCW, Size / Dimension="0.024\" L x 0.012\" W (0.60mm x 0.30mm)", Supplier 1=DigiKey
S1: library part EVQ-P7A01P, "Switch Tactile N.O. SPST Right Angle 0.05A 12V", Case/Package=SMD/SMT, Contact Current Rating=50mA, Contact Resistance=500mR, Manufacturer=Panasonic, Max Operating Temperature=70°C, Max Voltage Rating (DC)=12V, Min Operating Temperature=-20°C, Operating Force=2.2N, Package Quantity=1, Supplier Part Number 1=P16763CT-ND, Actuator Length=0.65mm, ComponentLink1Description=https://datasheet.ciiva.com/30108/atk0000ce20-3010, ComponentLink1URL=https://datasheet.ciiva.com/30108/atk0000ce20-3010, Creation Date=08/05/2019, Electrical Life=100000Cycles, Illumination Type=Non-Illuminated, Manufacturer Part Number=EVQ-P7A01P, Mechanical Life=100000Cycles, Mount="Surface Mount", Orientation="Right Angle", Packaging="Tape and Reel", Part Number=EVQ-P7A01P, Pricing 1="1=0,30000, 10=0,28800, 25=0,27840, 50=0,26860, 100", Radiation Hardening=No, REACH SVHC=Unknown, Revision Date=08/05/2019, RoHS=Yes, Stock 1=641, Supplier 1=Digi-Key, Switch Function=Off-Mom, Switch Travel=0.2mm, Termination="Gull Wing", Throw Configuration=SPST
U1: "IC REG LIN 3.3V 200MA 4FLIPCHIP", Manufacturer=STMicroelectronics, Supplier Part Number 1=497-18117-1-ND, ComponentLink1Description=https://www.st.com/resource/en/datasheet/stlq020.p, ComponentLink1URL=https://www.st.com/resource/en/datasheet/stlq020.p, Creation Date=28/10/2019, Manufacturer Part Number=STLQ020J33R, Part Number=STLQ020J33R, Pricing 1="1=0,57000, 10=0,49100, 100=0,36680, 500=0,28820, 1", Revision Date=28/10/2019, RoHS=No, Stock 1=2546, Supplier 1=Digi-Key
U2: library part WSM-BL241-ADA-008, "Bluetooth v5.0 (BLE) SMART SOC IoT/NFC 1Mbps 3.3V", Case/Package=Module, Current - Receiving=6mA, Current - Transmitting=7mA, Frequency=2.4GHz, Manufacturer=Murata, Max Operating Temperature=85°C, Min Operating Temperature=-40°C, Supplier Part Number 1=81-WSM-BL241-ADA-008, ComponentLink1Description=http://www.farnell.com/datasheets/2575837.pdf?src-, ComponentLink1URL=http://www.farnell.com/datasheets/2575837.pdf?src-, ComponentLink2Description=https://wireless.murata.com/RFM/data/mbn52832_prod, ComponentLink2URL=https://wireless.murata.com/RFM/data/mbn52832_prod, ComponentLink3Description=http://www.farnell.com/datasheets/2575837.pdf?src-, ComponentLink3URL=http://www.farnell.com/datasheets/2575837.pdf?src-, Creation Date=10/10/2019, Data Rate=1Mbps, Interface=I2C,SPI,UART, Manufacturer Part Number=WSM-BL241-ADA-008, Memory Size=64KB, Mount="Surface Mount", Packaging="Cut Tape", Part Number=WSM-BL241-ADA-008, Pricing 1="1=10,84000, 10=9,78000, 25=8,93000, 50=8,93000, 10", Revision Date=10/10/2019, RoHS=No, Sensitivity=-93dBm, Stock 1=4518, Supplier 1=Mouser
v: "Silkscreen version", Creation Date=15/04/2019, Part Number=Version, Revision Date=15/04/2019

## Via types
v1: diameter 0.45, hole 0.2, L1 to L4, tented both sides, 22 vias

## Nets (pads, with @x,y where several pads share a name; then routed paths per layer and width w, separated by ;. In a path a pad name is that pad's centre, name@x,y a point inside that pad or via, vN(x,y) a via of type N, cw(c..) or ccw(c..) an arc to the next point about the centre after c; other vN are vias at no path point)
BLUE: Q2.1 U2.26 | length 2.7
  L1 w0.127: Q2.1@-6.035,-3.626 cw(c0,0) -6.314,-3.114 -5.188,-2.325 U2.26
E_EXCITE: R8.2 U2.11 | length 1.2
  L1 w0.127: U2.11 2.22,-0.375 2.425,-0.17 R8.2
E_SENSE: C7.2 D2.1 R9.1 U2.9 | length 5.7
  L1 w0.127: U2.9 C7.2 2.425,-2.425 2.723,-2.723 2.723,-3.713 D2.1 ccw(c0,0) R9.1@4.392,-4.205
GND: B1.2 C1.1 C2.1 C3.2 C4.2 C5.1 C6.1 C7.1 GND1.1 Q2.2 Q3.2 Q4.2 R9.2 R10.1 S1.2 S1.2' U1.B2 U2.5 U2.19 U2.30 U2.31 U2.32 U2.33 U2.34 U2.35 | length 1.7
  L1 w0.152: C5.1 1.432,-5.004 1.476,-5.047 2.003,-5.047
  L4 w0.152: U1.B2 0.31,-7.41 C2.1
  other v1: -1.812,-6.761 2.95,-5.11 3.692,-4.21 5.726,-4.198 -0.481,-1.526 0.443,-1.007 3.71,-0.822 -5.616,-0.615 0.4,-0.1 -0.5,0.15 -1.491,0.163 3.728,1.45
GREEN: Q3.1 U2.24 | length 2.7
  L1 w0.127: Q3.1 -4.914,-1.025 U2.24
NetC3_1: C3.1 L1.2 U2.21 | length 3.4
  L1 w0.254: C3.1 L1.2 -5.994,-0.14 -5.7,0.154 -5.7,0.6 -5.375,0.925 U2.21
NetC4_1: C4.1 L1.1 U2.20 | length 4.1
  L1 w0.254: L1.1 C4.1 -6.377,1.423 -3.554,1.423 -3.45,1.319 U2.20
NetC6_2: C6.2 U2.8 | length 2.3
  L1 w0.127: U2.8 1.95,-2.325 2.327,-2.702 C6.2
NetC8_1: C8.1 D2.2 L2.1 | length 2.6
  L1 w0.127: D2.2 ccw(c0,0) 5.686,-3.449
NetC8_2: C8.2 J1.1 | length 2.2
  L1 w0.127: v1(4.681,-5.338) 4.681,-5.354 4.793,-5.466 ccw(c0,0) C8.2
  L4 w0.127: J1.1@3.55,-6.149 ccw(c0,0) v1(4.681,-5.338)
NetD1_2: D1.2 R7.1 | length 0.9
  L1 w0.127: R7.1 D1.2
NetD1_3: D1.3 R5.1 | length 1
  L1 w0.127: R5.1 -0.95,-3.925 -0.825,-3.8 D1.3
NetD1_4: D1.4 R6.1 | length 2.2
  L1 w0.127: R6.1 -0.95,-3.2 -0.801,-3.349 0.324,-3.349 0.425,-3.45 D1.4
NetL2_2: L2.2 R8.1 R10.2 | length 4.3
  L1 w0.127: R10.2 2.425,1.275 2.425,0.57 R8.1 5.386,0.525 L2.2 L2.2@5.353,0.923
NetQ2_3: Q2.3 R5.2 | length 3.1
  L1 w0.127: Q2.3@-4.833,-3.384 ccw(c0,0) -4.376,-3.957 -2.477,-3.957 -2.445,-3.925 R5.2
NetQ3_3: Q3.3 R6.2 | length 4.9
  L1 w0.127: Q3.3 v1(-5.207,-1.642) ; v1@-4.151,-3.526 -3.825,-3.2 R6.2
  L4 w0.127: v1(-5.207,-1.642) ccw(c0,0) v1(-4.163,-3.532)
NetQ4_3: Q4.3 R7.2 | length 1.6
  L1 w0.127: Q4.3@-3.531,-4.601 ccw(c0,0) -3.327,-4.751 -2.502,-4.751 -2.401,-4.65 R7.2
ONOFF: S1.1' U2.2 | length 7.6
  L1 w0.127: U2.2 -2.8,-2.7 -2.685,-2.816 -0.91,-2.816 -0.63,-3.095 0.595,-3.095 0.85,-3.35 0.85,-5.625 1,-5.775 S1.1'
RED: Q4.1 U2.1 | length 5.7
  L1 w0.127: Q4.1 -4.446,-4.972 cw(c0,0) -5.798,-3.296 -5.203,-2.879 -3.587,-2.879 -3.45,-2.742 U2.1
SWD_CLK: CLK1.1 U2.18 | length 10.1
  L1 w0.127: U2.18 -2.15,2 v1(-2.15,2.125)
  L3 w0.127: v1(-4.199,-4.631) -2.031,-2.24 cw(c0,0) v1(-2.15,2.125)
  L4 w0.127: CLK1.1 v1(-4.199,-4.631)
SWD_DIO: DIO1.1 U2.16 | length 11.1
  L1 w0.127: U2.16 -0.85,2 v1(-0.85,2.125)
  L3 w0.127: v1(-2.992,-5.488) -1.096,-2.01 cw(c0,0) v1(-0.85,2.125)
  L4 w0.127: DIO1.1 v1(-2.992,-5.488)
Vbat: B1.1 C2.2 D1.1 U1.A1 U1.B1 | length 30
  L1 w0.152: v1(0,-5.8) 0.425,-5.375 D1.1
  L3 w0.152: v1(-6.247,-1.97) -7.201,-2.27 ccw(c0,0) 0,-7.55 ; v1(0,-5.8) 0,-7.55 ; v1(7.382,-1.582) cw(c0,0) 0,-7.55
  L4 w0.152: B1.1@-6.7,0 -6.7,-1.97 v1(-6.247,-1.97) ; U1.A1 -0.3,-6.8 -0.3,-6.1 v1(0,-5.8) 0.6,-5.8 0.9,-6.1 C2.2 0.89,-6.8 0.3,-6.8 U1.B1
Vdd: C1.2 U1.A2 | length 0.7
  L4 w0.152: C1.2 -0.318,-7.4 -0.218,-7.3 U1.A2
Vdd_1V8: C5.2 U2.6 | length 2.7
  L1 w0.152: U2.6 -0.2,-2.725 -0.097,-2.828 0.903,-2.828 1.412,-3.337 1.412,-3.72 C5.2
pads on no net: S1.1 U2.3 U2.4 U2.7 U2.10 U2.12 U2.13 U2.14 U2.15 U2.17 U2.22 U2.23 U2.25 U2.27 U2.28 U2.29 U2.36 U2.37

## Polygon pours and split planes (outlines as drawn)
no net on Mechanical 15 (solid): -6.5,5
GND on L2 "L2-No Net" (solid, pour order 2): 8,1.7 8,-8 -8,-8 -8,1.7
GND on L3 "L3-No Net" (solid, pour order 4): 8,1.7 8,-8 -8,-8 -8,1.7
GND on L4 "L4-No Net" (solid, pour order 6): 8,1.7 8,-8 -8,-8 -8,1.7
GND on L1 "L1-No Net" (solid, remove dead copper, pour order 0): 8,1.7 8,-8 -8,-8 -8,1.7

## Keep-outs
Keep-Out Layer:
  the board outline again, w0.025

## Other copper
L1:
  region net GND: 2.5,-7.365 cw(c0,0) 1.1,-7.7 1.1,-6.8 2.5,-6.8
  region net GND: -2.5,-7.365 ccw(c0,0) -1.1,-7.7 -1.1,-6.8 -2.5,-6.8
  pour cut-out: 8,5 -8,5 -8,1.7 8,1.7
L2:
  pour cut-out: 8,5 -8,5 -8,1.7 8,1.7
L3:
  pour cut-out: 8,5 -8,5 -8,1.7 8,1.7
L4:
  pour cut-out: 8,5 -8,5 -8,1.7 8,1.7

## Silkscreen, mask and mechanical layers (free items; w line width, h text height)
Top Overlay:
  drawing of 2 lines, arcs and shapes, not listed
Bottom Overlay:
  drawing of 13 lines, arcs and shapes, not listed
Mechanical 7:
  the board outline again, w0.127